# EAGLE board yabr6v3 (EAGLE 9.1.3)
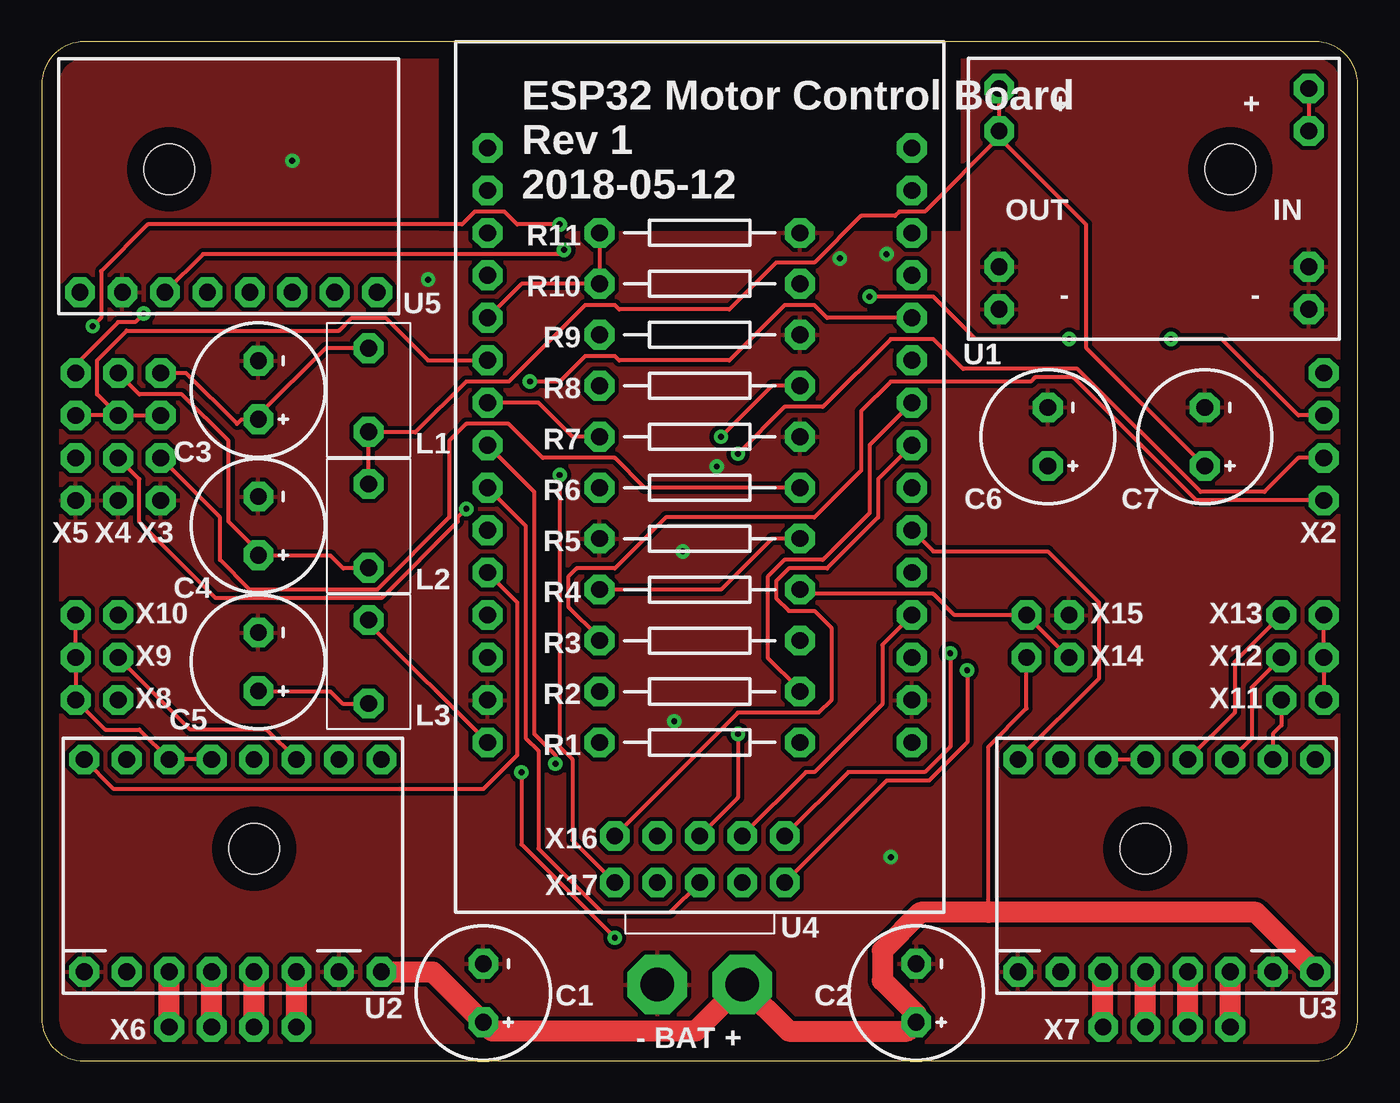
[diagram p0: board, top side]
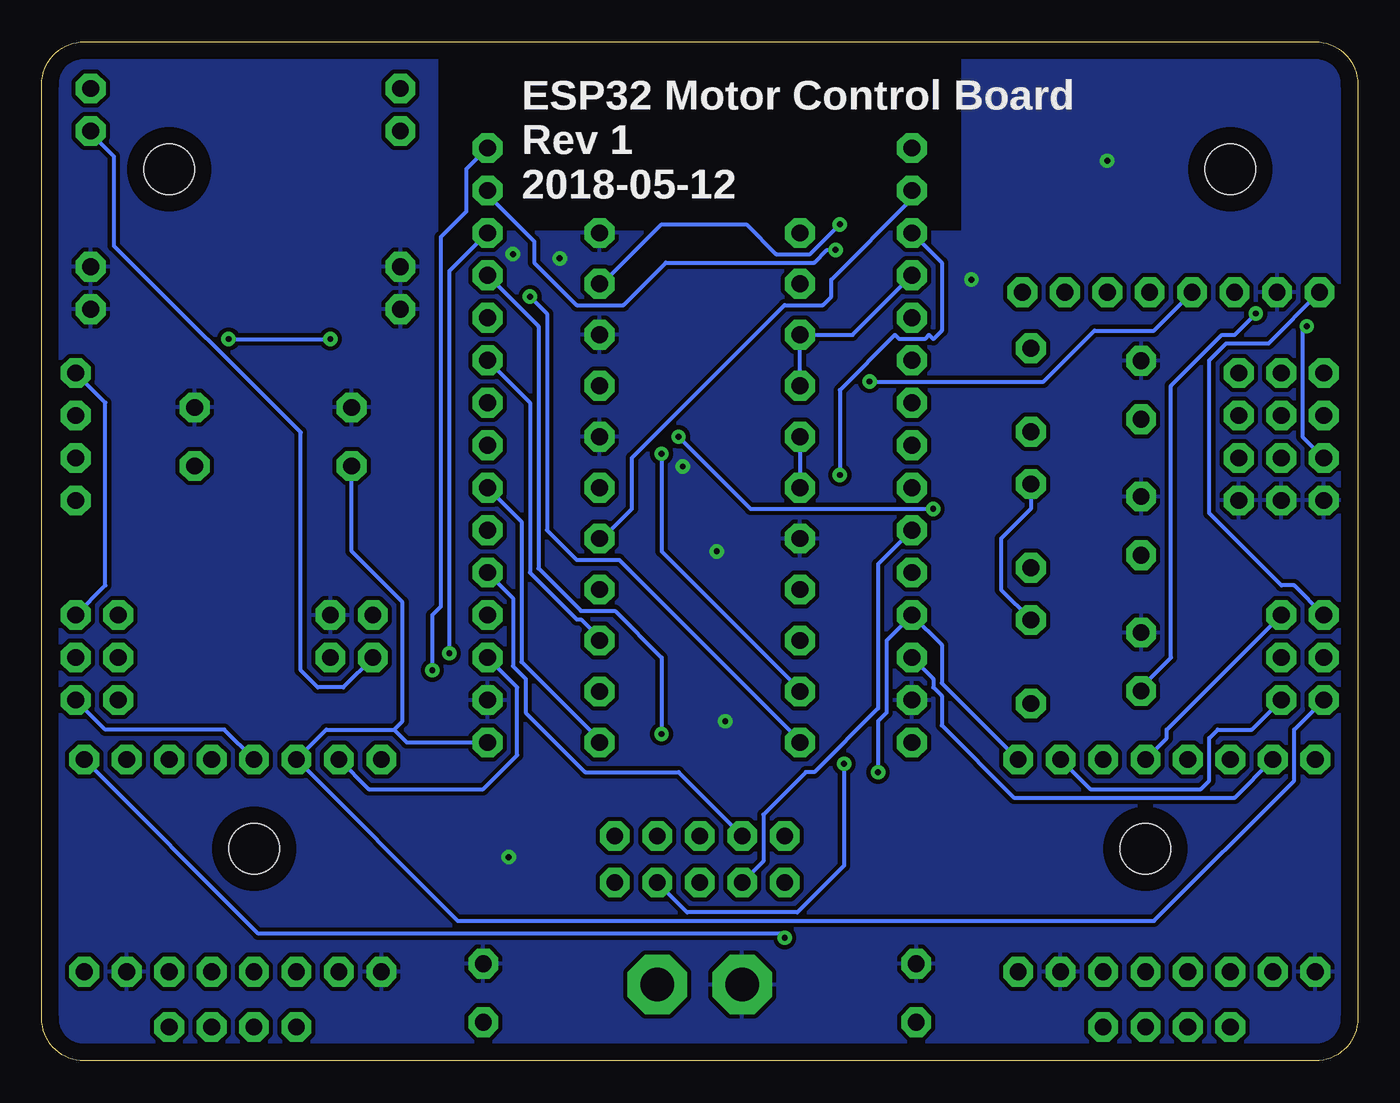
[diagram p1: board, bottom side, seen from below]

Size 78.74 x 60.96 mm. Coordinates in mm from the lower left corner, seen from the top.
Outline: 0,2.54 arc90 2.54,0 76.2,0 arc90 78.74,2.54 78.74,58.42 arc90 76.2,60.96 2.54,60.96 arc90 0,58.42 0,2.54
Copper layers (1*16): Top 0.035mm / dielectric 1.5mm / Bottom 0.035mm
Design rules "default *": minimum track width 10mil, minimum drill 0.35mm, track to track 10mil, track to pad 10mil, pad to pad 10mil, via to via 10mil, smd to smd 10mil, copper to edge 40mil, drill to drill 10mil, minimum pad ring 10mil, minimum via ring 10mil, stop-mask expansion 4mil, vias tented up to drill 0mil, thermal gap 10mil
Holes 3 mm at 66.04,12.7 12.7,12.7 71.12,53.34 7.62,53.34
tRestrict: area 27.9,50.8 to 50.8,61
bRestrict: area 27.9,50.8 to 50.8,61

## Footprints (pad centres in the part's own frame; a part is rotated, then mirrored left to right if it is on the bottom)
CPOL_3,5 = drill 1 pad 1.778 octagon: N 1.75,0; P -1.75,0
NEOSID_SD75 = drill 1 pad 1.778 octagon: N 2.5,0; P -2.5,0
R_12 = drill 1 pad 1.778 octagon: N 0,6; P 0,-6
D-SUN_SWITCHING = drill 1 pad 1.778 octagon: NI -9.27,6.6; NI2 -9.27,4.06; NO 9.27,6.6; NO2 9.27,4.06; PI -9.27,-4.06; PI2 -9.27,-6.6; PO 9.27,-4.06; PO2 9.27,-6.6
DRV8825 = drill 1 pad 1.778 octagon: P$1 0,0; P$2 2.54,0; P$3 5.08,0; P$4 7.62,0; P$5 10.16,0; P$6 12.7,0; P$7 15.24,0; P$8 17.78,0; P$9 17.78,-12.7; P$10 15.24,-12.7; P$11 12.7,-12.7; P$12 10.16,-12.7; P$13 7.62,-12.7; P$14 5.08,-12.7; P$15 2.54,-12.7; P$16 0,-12.7
ESP-32-DEV = drill 1 pad 1.778 octagon: P$1 0,0; P$2 2.54,0; P$3 5.08,0; P$4 7.62,0; P$5 10.16,0; P$6 12.7,0; P$7 15.24,0; P$8 17.78,0; P$9 20.32,0; P$10 22.86,0; P$11 25.4,0; P$12 27.94,0; P$13 30.48,0; P$14 33.02,0; P$15 35.56,0; P$16 35.56,-25.4; P$17 33.02,-25.4; P$18 30.48,-25.4; P$19 27.94,-25.4; P$20 25.4,-25.4; P$21 22.86,-25.4; P$22 20.32,-25.4; P$23 17.78,-25.4; P$24 15.24,-25.4; P$25 12.7,-25.4; P$26 10.16,-25.4; P$27 7.62,-25.4; P$28 5.08,-25.4; P$29 2.54,-25.4; P$30 0,-25.4
GY-521 = drill 1 pad 1.778 octagon: P$1 0,0; P$2 2.54,0; P$3 5.08,0; P$4 7.62,0; P$5 10.16,0; P$6 12.7,0; P$7 15.24,0; P$8 17.78,0
BAT = drill 2 pad 3.556 octagon: N -2.54,0; P 2.54,0
X4 = drill 1 pad 1.778 octagon: P$1 -2.54,0; P$2 0,0; P$3 2.54,0; P$4 5.08,0
X2 = drill 1 pad 1.778 octagon: P$1 -1.27,0; P$2 1.27,0
X5 = drill 1 pad 1.778 octagon: P$1 -5.08,0; P$2 -2.54,0; P$3 0,0; P$4 2.54,0; P$5 5.08,0

## Placement (x,y rotation side)
C1  220µ  [CPOL_3,5]  26.42,4.06 90 top
C2  220µ  [CPOL_3,5]  52.32,4.06 90 top
C3  220µ  [CPOL_3,5]  12.95,40.13 90 top
C4  220µ  [CPOL_3,5]  12.95,32 90 top
C5  220µ  [CPOL_3,5]  12.95,23.88 90 top
C6  220µ  [CPOL_3,5]  60.2,37.34 90 top
C7  220µ  [CPOL_3,5]  69.6,37.34 90 top
L1  1m  [NEOSID_SD75]  19.56,40.13 90 top
L2  1m  [NEOSID_SD75]  19.56,32 270 top
L3  1m  [NEOSID_SD75]  19.56,23.88 270 top
R1  150  [R_12]  39.37,19.05 270 top
R2  82  [R_12]  39.37,22.1 270 top
R3  39  [R_12]  39.37,25.15 270 top
R4  27k  [R_12]  39.37,28.19 270 top
R5  4k7  [R_12]  39.37,31.24 270 top
R6  3k3  [R_12]  39.37,34.29 270 top
R7  6k8  [R_12]  39.37,37.34 270 top
R8  3k3  [R_12]  39.37,40.39 270 top
R9  6k8  [R_12]  39.37,43.43 270 top
R10  3k3  [R_12]  39.37,46.48 270 top
R11  6k8  [R_12]  39.37,49.53 270 top
U1  D-SUN_SWITCHING  [D-SUN_SWITCHING]  66.55,51.56 180 top
U2  DRV8825  [DRV8825]  20.32,5.33 180 top
U3  DRV8825  [DRV8825]  76.2,5.33 180 top
U4  ESP-32-DEV  [ESP-32-DEV]  52.07,54.61 270 top
U5  GY-521  [GY-521]  20.07,45.97 180 top
X1  BAT  [BAT]  39.37,4.57 0 top
X2  X4  [X4]  76.71,38.61 270 top
X3  X4  [X4]  7.11,38.61 270 top
X4  X4  [X4]  4.57,38.61 270 top
X5  X4  [X4]  2.03,38.61 270 top
X6  X4  [X4]  10.16,2.03 0 top
X7  X4  [X4]  66.04,2.03 0 top
X8  X2  [X2]  3.3,21.59 180 top
X9  X2  [X2]  3.3,24.13 180 top
X10  X2  [X2]  3.3,26.67 180 top
X11  X2  [X2]  75.44,21.59 0 top
X12  X2  [X2]  75.44,24.13 0 top
X13  X2  [X2]  75.44,26.67 0 top
X14  X2  [X2]  60.2,24.13 0 top
X15  X2  [X2]  60.2,26.67 0 top
X16  X5  [X5]  39.37,13.46 0 top
X17  X5  [X5]  39.37,10.67 180 top

## Library data of the parts
C1-C7 L1-L3 R1-R11 U1-U5 X1-X17 = draradech

## Nets
3V3: C6.P U2.P$11 U2.P$12 U3.P$11 U3.P$12 U4.P$15 U5.P$8 X2.P$1 X8.P$2 X9.P$2 X10.P$2 X11.P$2 X12.P$2 X13.P$2
5V: C7.P L1.P L2.P L3.P U1.PO U1.PO2 U4.P$16
GND: C1.N C2.N C3.N C4.N C5.N C6.N C7.N R5.P R7.N R9.N R11.N U1.NI U1.NI2 U1.NO U1.NO2 U2.P$2 U2.P$8 U3.P$2 U3.P$8 U4.P$14 U4.P$17 U5.P$7 X1.N X3.P$4 X4.P$4 X5.P$4 X15.P$2
LED_B: R3.N U4.P$6
LED_G: R2.N U4.P$7
LED_R: R1.N U4.P$9
M1_DIR: U2.P$9 U4.P$20
M1_STEP: U2.P$10 U4.P$18
M2_DIR: U3.P$9 U4.P$10
M2_STEP: U3.P$10 U4.P$13
M_EN: U2.P$16 U3.P$16 U4.P$19
N$1: U2.P$5 X6.P$2
N$2: U2.P$6 X6.P$1
N$3: U2.P$4 X6.P$3
N$4: U2.P$3 X6.P$4
N$5: U3.P$5 X7.P$2
N$6: U3.P$6 X7.P$1
N$7: U3.P$4 X7.P$3
N$8: U3.P$3 X7.P$4
N$9: U2.P$15 X8.P$1
N$10: U2.P$14 X9.P$1
N$11: U2.P$13 X10.P$1
N$12: U3.P$15 X11.P$1
N$13: U3.P$14 X12.P$1
N$14: U3.P$13 X13.P$1
N$15: C3.P L1.N X3.P$1
N$16: R3.P X2.P$4
N$17: R2.P X2.P$3
N$18: C4.P L2.N X4.P$1
N$19: R6.N X3.P$3
N$20: R4.N X14.P$2 X15.P$1
N$21: C5.P L3.N X5.P$1
N$22: R8.N X4.P$3
N$23: R1.P X2.P$2
N$24: U4.P$8 X16.P$1
N$25: R10.N X5.P$3
N$26: U4.P$11 X16.P$2
N$27: U4.P$4 X16.P$3
N$28: U4.P$12 X16.P$4
N$29: U4.P$3 X16.P$5
N$30: U4.P$1 X17.P$1
N$31: U4.P$23 X17.P$2
N$32: U4.P$22 X17.P$3
N$33: U4.P$21 X17.P$4
N$34: U4.P$28 X17.P$5
SCL: U4.P$2 U5.P$6
SDA: U4.P$5 U5.P$5
U1_PULSE: R6.P R7.P U4.P$24
U2_PULSE: R8.P R9.P U4.P$27
U3_PULSE: R10.P R11.P U4.P$26
U_TRG: U4.P$25 X3.P$2 X4.P$2 X5.P$2
VBAT: C1.P C2.P U1.PI U1.PI2 U2.P$1 U3.P$1 X1.P X14.P$1
VSENS: R4.P R5.N U4.P$29

## Tracks (layer width: path | path; a pad name or v marks a point on that pad's centre or on a via)
3V3
  Top 0.254: U2.P$12 U2.P$11 5.84,19.81 3.81,19.81 X8.P$2 X9.P$2 X10.P$2 | X11.P$2 X12.P$2 X13.P$2 | U3.P$11 U3.P$12
  Bottom 0.254: U5.P$8 5.33,42.93 7.87,42.93 8.89,41.91 8.89,32.77 4.57,28.45 3.81,28.45 X10.P$2 | X2.P$1 74.93,39.37 74.93,28.45 X13.P$2 | U4.P$15 56.9,19.05 57.66,19.81 | 57.66,19.81 61.72,19.81 U3.P$11 53.85,8.38 12.19,8.38 3.81,16.76 3.81,19.81 X8.P$2 | C6.P 60.2,30.48 57.15,27.43 57.15,20.32 57.66,19.81 | X11.P$2 74.93,19.81 67.82,19.81 U3.P$12
5V
  Top 0.254: U4.P$16 19.56,26.16 L3.P | L2.P 19.56,37.59 | C7.P 69.6,35.81 69.34,35.81 62.48,42.67 62.48,50.04 57.15,55.37 57.28,55.5 U1.PO | 19.56,37.59 22.35,37.59 25.4,40.64 27.94,40.64 32.51,45.21 34.29,45.21 34.54,44.96 41.15,44.96 43.94,47.75 46.23,47.75 49.02,50.55 51.05,50.55 51.31,50.8 52.83,50.8 57.4,55.37 57.28,55.5 U1.PO | 19.56,37.59 L1.P | U1.PO2 U1.PO
  Bottom 0.254: L2.P 19.56,33.02 21.34,31.24 21.34,28.19 19.56,26.42 L3.P
GND  (via drill 0.35)
  other vias: 14.99,53.85 23.11,46.74 50.55,48.26 47.75,48.01 40.39,35.56 37.85,20.32 50.8,12.19 38.35,30.48
  pour Bottom: 0,0 0,60.96 23.62,60.96 23.62,49.53 55.12,49.53 55.12,60.96 78.74,60.96 78.74,0
  pour Top: 0,0 0,60.96 23.62,60.96 23.62,49.53 55.12,49.53 55.12,60.96 78.74,60.96 78.74,0
LED_B
  Bottom 0.254: U4.P$6 49.53,39.37 49.53,29.21 46.74,26.42 46.48,26.42 45.47,25.4 45.47,25.15 R3.N
LED_G
  Top 0.254: U4.P$7 49.53,36.83 49.53,32.77 46.74,29.97 44.45,29.97 43.43,28.96 43.43,24.13 45.21,22.35 45.21,22.1 R2.N
LED_R
  Bottom 0.254: U4.P$9 50.04,32.26 50.04,23.88 45.47,19.3 45.47,19.05 R1.N
M1_DIR
  Top 0.254: U2.P$9 4.32,16.26 26.42,16.26 28.45,18.29 28.45,27.43 U4.P$20
M1_STEP
  Bottom 0.254: U2.P$10 7.37,15.75 20.57,15.75 24.89,20.07 24.89,21.84 25.4,22.35 25.4,22.86 U4.P$18
M2_DIR
  Top 0.254: U3.P$9 63.25,22.86 63.25,27.43 60.2,30.48 53.34,30.48 U4.P$10
M2_STEP
  Bottom 0.254: U4.P$13 50.29,22.35 50.29,18.29 52.32,16.26 59.18,16.26 U3.P$10
M_EN  (via drill 0.35)
  Top 0.254: v34.29,7.37 28.7,12.95 v28.7,17.27
  Bottom 0.254: U2.P$16 24.89,22.61 24.89,24.89 U4.P$19 28.19,25.15 28.19,20.83 28.7,20.32 v28.7,17.27 | U3.P$16 65.79,7.62 34.54,7.62 v34.29,7.37
N$1
  Top 1.27: X6.P$2 U2.P$5
N$2
  Top 1.27: X6.P$1 U2.P$6
N$3
  Top 1.27: X6.P$3 U2.P$4
N$4
  Top 1.27: X6.P$4 U2.P$3
N$5
  Top 1.27: X7.P$2 U3.P$5
N$6
  Top 1.27: X7.P$1 U3.P$6
N$7
  Top 1.27: X7.P$3 U3.P$4
N$8
  Top 1.27: X7.P$4 U3.P$3
N$9
  Bottom 0.254: X8.P$1 6.35,19.81 8.38,19.81 8.89,19.3 8.89,16.76 9.4,16.26 16,16.26 U2.P$15
N$10
  Top 0.254: X9.P$1 8.89,19.81 13.46,19.81 U2.P$14
N$11
  Bottom 0.254: X10.P$1 11.43,19.81 11.43,19.3 U2.P$13
N$12
  Top 0.254: U3.P$15 73.66,19.56 74.17,20.07 X11.P$1
N$13
  Top 0.254: U3.P$14 72.39,19.3 72.39,22.35 X12.P$1
N$14
  Top 0.254: U3.P$13 71.37,20.83 71.37,23.88 X13.P$1
N$15
  Top 0.254: X3.P$1 8.64,41.15 11.68,38.1 11.94,38.35 12.95,38.35 C3.P 12.95,38.61 17.02,42.67 19.56,42.67 L1.N
N$16
  Top 0.254: X2.P$4 69.09,33.53 61.72,40.89 59.44,40.89 59.18,40.64 50.8,40.64 49.02,38.86 49.02,35.31 46.23,32.51 37.34,32.51 34.29,29.46 32,29.46 31.5,28.96 31.5,27.18 33.27,25.4 33.27,25.15 R3.P
N$17  (via drill 0.35)
  Top 0.254: v41.66,36.32 44.45,39.12 46.74,39.12 50.8,43.18 53.34,43.18 55.12,41.4 61.98,41.4 69.34,34.04 73.15,34.04 75.18,36.07 X2.P$3
  Bottom 0.254: v41.66,36.32 41.66,30.48 33.53,22.35 33.53,22.1 R2.P
N$18
  Top 0.254: L2.N 19.56,29.46 18.03,29.46 17.27,30.23 12.95,30.23 C4.P 12.95,30.48 11.18,32.26 11.18,37.08 8.38,39.88 5.84,39.88 X4.P$1
N$19
  Top 0.254: X3.P$3 10.67,32.51 10.67,29.97 12.45,28.19 20.07,28.19 24.38,32.51 24.38,37.08 25.4,38.1 27.94,38.1 29.97,36.07 34.29,36.07 36.07,34.29 R6.N
N$20
  Top 0.254: R4.N 45.72,28.19 45.97,27.94 53.34,27.94 54.61,26.67 X15.P$1 X14.P$2
N$21  (via drill 0.35)
  Top 0.254: C5.P 12.95,22.1 17.27,22.1 18.03,21.34 19.56,21.34 L3.N | X5.P$1 2.03,41.66 4.57,44.2 5.59,44.2 v6.1,44.7
  Bottom 0.254: v6.1,44.7 7.37,43.43 8.13,43.43 11.18,40.39 11.18,24.13 12.95,22.35 C5.P
N$22  (via drill 0.35)
  Top 0.254: X4.P$3 5.84,34.8 5.84,32.26 10.41,27.69 20.32,27.69 24.89,32.26 24.89,32.51 v25.4,33.02 | v40.64,37.34 43.69,40.39 R8.N
  Bottom 0.254: v25.4,33.02 36.32,33.02 v40.64,37.34
N$23  (via drill 0.35)
  Top 0.254: v49.53,45.72 53.34,45.72 55.88,43.18 v61.47,43.18 | v67.56,43.18 70.61,43.18 75.18,38.61 X2.P$2
  Bottom 0.254: v49.53,45.72 48.51,44.7 48.51,31.75 46.74,29.97 44.2,29.97 33.53,19.3 33.53,19.05 R1.P | v67.56,43.18 v61.47,43.18
N$24
  Top 0.254: X16.P$1 41.66,20.83 46.48,20.83 47.24,21.59 47.24,25.91 46.23,26.92 44.7,26.92 43.94,27.69 43.94,28.7 44.7,29.46 46.99,29.46 50.04,32.51 50.04,34.8 U4.P$8
N$25  (via drill 0.35)
  Top 0.254: v3.05,43.94 3.56,44.45 3.56,47.24 6.35,50.04 25.15,50.04 25.91,50.8 27.69,50.8 28.45,50.04 v30.99,50.04
  Bottom 0.254: X5.P$3 3.3,37.34 3.3,43.69 v3.05,43.94 | v30.99,50.04 32.77,48.26 34.8,48.26 36.58,50.04 41.66,50.04 45.21,46.48 R10.N
N$26
  Bottom 0.254: X16.P$2 40.64,17.27 46.23,17.27 49.78,20.83 49.78,22.86 50.55,23.62 50.55,27.69 U4.P$11
N$27  (via drill 0.35)
  Top 0.254: X16.P$3 41.66,15.75 v41.66,19.56
  Bottom 0.254: v41.66,19.56 41.66,24.13 44.45,26.92 46.48,26.92 49.02,29.46 49.02,43.94 U4.P$4
N$28
  Top 0.254: X16.P$4 45.72,17.27 46.23,17.27 50.29,21.34 50.29,24.89 U4.P$12
N$29  (via drill 0.35)
  Top 0.254: X16.P$5 48.26,17.27 52.83,17.27 54.36,18.8 v54.36,24.38
  Bottom 0.254: v54.36,24.38 54.36,47.24 U4.P$3
N$30  (via drill 0.35)
  Top 0.254: X17.P$1 50.55,16.76 53.09,16.76 55.37,19.05 v55.37,23.37
  Bottom 0.254: v55.37,23.37 55.37,26.67 54.86,27.18 54.86,49.28 53.34,50.8 53.34,53.34 U4.P$1
N$31  (via drill 0.35)
  Top 0.254: v30.73,17.78 30.73,18.29 29.46,19.56 29.46,34.04 U4.P$23
  Bottom 0.254: X17.P$2 40.13,8.89 33.53,8.89 30.73,11.68 v30.73,17.78
N$32
  Top 0.254: X17.P$3 37.59,8.89 33.53,8.89 29.72,12.7 29.72,18.54 28.96,19.3 28.96,32 U4.P$22
N$33
  Bottom 0.254: X17.P$4 35.56,11.94 35.56,14.73 33.02,17.27 32.51,17.27 28.7,21.08 28.7,29.72 U4.P$21
N$34  (via drill 0.35)
  Top 0.254: X17.P$5 31.75,13.21 31.75,18.03 30.99,18.8 v30.99,35.05
  Bottom 0.254: v30.99,35.05 30.99,40.13 27.69,43.43 27.43,43.18 25.91,43.18 25.65,43.43 25.4,43.18 24.89,43.69 24.89,47.75 U4.P$28
SCL  (via drill 0.35)
  Top 0.254: U5.P$6 9.65,48.26 30.99,48.26 v31.24,48.51
  Bottom 0.254: v31.24,48.51 31.75,48.51 32.51,47.75 41.4,47.75 43.94,45.21 46.74,45.21 49.28,47.75 49.28,49.02 52.07,51.82 U4.P$2
SDA  (via drill 0.35)
  Top 0.254: v29.21,40.64 30.99,40.64 32.51,42.16 34.29,42.16 34.54,41.91 41.15,41.91 44.45,45.21 46.23,45.21 46.99,44.45 U4.P$5
  Bottom 0.254: U5.P$5 12.19,43.69 15.75,43.69 18.8,40.64 v29.21,40.64
U1_PULSE
  Top 0.254: U4.P$24 29.72,39.37 31.75,37.34 R7.P
  Bottom 0.254: R7.P R6.P
U2_PULSE
  Bottom 0.254: U4.P$27 30.23,43.43 R9.P R8.P
U3_PULSE
  Top 0.254: U4.P$26 28.7,46.48 R10.P R11.P
U_TRG
  Top 0.254: X4.P$2 X5.P$2 | X4.P$2 X3.P$2 | U4.P$25 23.11,41.91 20.57,44.45 18.54,44.45 17.78,43.69 5.08,43.69 3.3,41.91 3.3,39.88 X4.P$2
VBAT
  Top 0.254: X14.P$1 58.93,21.08 56.64,18.8 56.64,8.89 | U1.PI2 U1.PI
  Top 1.27: U2.P$1 23.4,5.33 C1.P 26.95,1.78 39.12,1.78 X1.P 44.7,1.78 51.79,1.78 C2.P 52.32,2.79 50.29,4.83 50.29,6.6 52.58,8.89 56.64,8.89 72.64,8.89 U3.P$1
  Bottom 0.254: X14.P$1 60.71,22.35 62.23,22.35 63.25,23.37 63.25,37.59 74.42,48.77 74.42,54.1 75.82,55.5 U1.PI
VSENS
  Top 0.254: R4.P 40.64,28.19 43.69,31.24 R5.N
  Bottom 0.254: U4.P$29 26.67,51.56 31.5,46.74 31.5,45.72 32,45.21 34.29,45.21 43.43,36.07 43.43,33.02 45.21,31.24 R5.N

## Text on the board
tNames: ESP32 Motor Control Board / Rev 1 / 2018-05-12
bNames: ESP32 Motor Control Board / Rev 1 / 2018-05-12